# Allegro board W8782_baseboard.brd
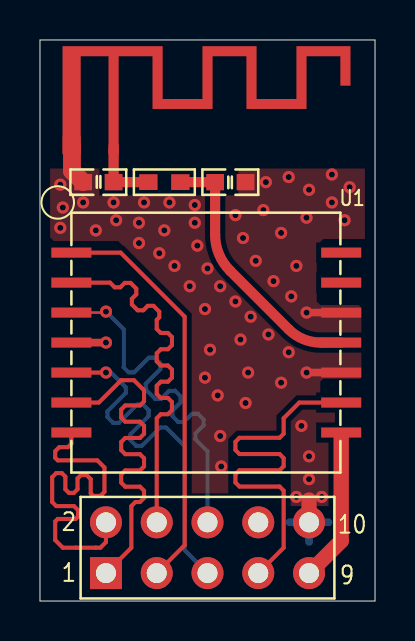
[diagram p0: board, top side]
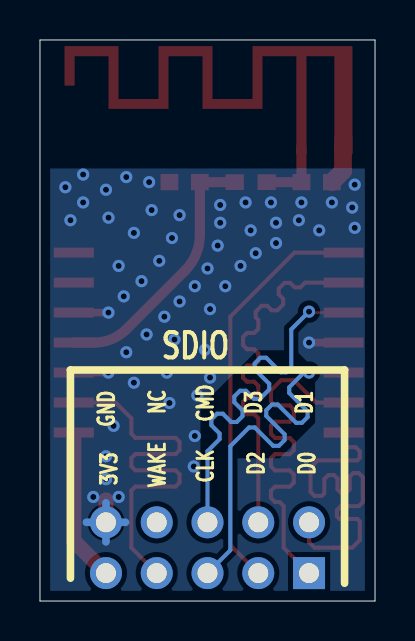
[diagram p1: board, bottom side, seen from below]

Outline 16.76 x 28.07 mm; copper layers: TOP, BOTTOM. Coordinates in mm from the lower left corner of the outline.
Outline path: 0,28.07 0,0 16.76,0 16.76,28.07 0,28.07

## Placement (name value [footprint] x y rotation side)
C1  NC  [C0603]  9.52 20.96 0 top
C2  NC  [C0603]  2.92 20.96 180 top
E1  ANTENNA  [W8782_ANT]  3.68 22.61 90 top
J1  HEADER 5X2  [HDR_2X5]  3.3 1.4 0 top
L1  10pF  [R0603]  6.22 20.96 180 top
NOREF  -  []  0 28.07 0 top
NOREF#2  -  []  16.76 0 90 top
U1  W8782  [W8782_MODULE]  8.38 12.95 90 top

## Library data of the parts
C1 C2 = CAP NP
E1 = ANTENNA
J1 = HEADER 5X2
L1 = INDUCTANCE
U1 = W8782

## Footprints (pads in the part's own frame, mm; a bottom-side part is the same pattern mirrored in y, then rotated)
C0603
  rect 0.889x0.813 smd: 1(-0.762,0) 2(0.762,0)
HDR_2X5
  rect 1.6x1.6 hole 1: 1(0,0)
  round 1.6 hole 1: 2(0,2.54) 3(2.54,0) 4(2.54,2.54) 5(5.08,0) 6(5.08,2.54) 7(7.62,0) 8(7.62,2.54) 9(10.16,0) 10(10.16,2.54)
R0603
  rect 0.914x0.787 smd: 1(-0.8,0) 2(0.8,0)
W8782_ANT
  rect 0.9x0.9 smd: (0.202,2.098)
  rect 0.5x0.5 smd: 1(0,0)
W8782_MODULE
  rect 0.5x2 smd: 1(4.475,6.811) 2(2.975,6.811) 3(1.475,6.811) 4(-0.025,6.811) 5(-1.525,6.811) 6(-3.025,6.811) 7(-4.525,6.811) 8(-4.525,-6.689) 9(-3.025,-6.689) 10(-1.525,-6.689) 11(-0.025,-6.689) 12(1.475,-6.689) 13(2.975,-6.689) 14(4.475,-6.689)

## Nets
GND: C1.2 C2.2 J1.10 U1.4(GND#4) U1.10(GND#10) U1.12(GND#12)
VCC_3V3: J1.9 U1.8(3V3)
SDIO_CLK: J1.5 U1.5(SD_CLK)
SDIO_CMD: J1.6 U1.3(SD_CMD)
SDIO_D0: J1.1 U1.6(SD_D0)
SDIO_D1: J1.2 U1.7(SD_D1)
SDIO_D2: J1.3 U1.1(SD_D2)
SDIO_D3: J1.4 U1.2(SD_D3)
WL_WAKE: J1.7 U1.9(PDN)
N00134: C1.1 L1.1 U1.11(ANT_RF)
N00570: C2.1 E1.1 L1.2

Pads without a net: J1 8; U1 13 14

## Via types
v1: diameter 0.61, hole 0.305, TOP to BOTTOM, 60 vias

## Routing (per net, layer and track width the routed paths; a pad name or vN(x,y) marks a point on that pad's centre or on a via; arc(x,y) is an arc through that point)
GND: length 12.3
  TOP w0.381: U1.12 v1(13.34,14.43) ; U1.4 v1(3.3,12.93) ; U1.10 v1(13.34,11.43)
  TOP w0.762: J1.10 13.46,5.05
  TOP w0.889: C2.2 1.6,21.51 1.6,22.81
  BOTTOM w0.381: J1.10 14.44,3.94 ; J1.10 12.48,3.94 ; J1.10 13.46,4.92 ; J1.10 13.46,2.96
  vias: v1(1.02,20.83) v1(1.02,18.67) v1(1.14,19.68) v1(2.16,19.94) v1(2.79,18.54) v1(3.68,19.94) v1(3.81,19.05) v1(4.95,18.92) v1(4.95,17.91) v1(5.21,19.94) v1(5.97,17.4) v1(6.22,18.54) v1(6.48,19.94) v1(6.73,16.76) v1(7.49,15.75) v1(7.75,19.81) v1(7.75,18.92) v1(7.87,17.78) v1(8.25,14.61) v1(8.25,11.18) v1(8.38,16.64) v1(8.51,12.57) v1(8.89,10.29) v1(9.02,15.75) v1(9.02,8.25) v1(9.07,6.73) v1(9.78,19.3) v1(9.78,14.99) v1(10.03,13.08) v1(10.16,18.16) v1(10.29,9.91) v1(10.41,11.43) v1(10.54,14.22) v1(10.8,17.02) v1(11.18,19.56) v1(11.3,20.96) v1(11.43,13.34) v1(11.68,16) v1(12.07,18.41) v1(12.07,10.92) v1(12.45,21.21) v1(12.45,12.45) v1(12.57,15.24) v1(12.83,16.76) v1(12.83,5.21) v1(13.08,8.76) v1(13.34,19.18) v1(13.46,20.57) v1(13.46,7.24) v1(13.46,6.1) v1(14.1,5.21) v1(14.61,21.34) v1(14.61,19.94) v1(15.24,19.05) v1(15.49,20.7)
VCC_3V3: length 7.7
  TOP w0.254: U1.8 15.07,8.15
  TOP w0.762: 15.07,8.15 15.07,3.01 J1.9
SDIO_CLK: length 19.9
  TOP w0.203: U1.5 v1(3.3,11.43)
  BOTTOM w0.203: J1.5 7.24,2.54 7.24,7.75 6.3,8.68 6.02,8.68 5.1,7.76 4.81,7.76 4.52,8.05 4.52,8.34 5.44,9.26 5.44,9.54 5.15,9.83 4.87,9.83 3.95,8.91 3.66,8.91 3.37,9.2 3.37,9.49 4.29,10.41 4.29,10.69 3.56,11.43 v1(3.3,11.43)
SDIO_CMD: length 19.8
  TOP w0.127: v1(3.3,14.48) 3.25,14.43 U1.3
  BOTTOM w0.203: v1(3.3,14.48) 4.19,13.59 4.19,11.68 4.43,11.44 4.72,11.44 5.45,12.17 5.74,12.17 6.02,11.88 6.02,11.6 5.29,10.87 5.29,10.58 5.77,10.11 6.05,10.11 6.47,10.52 6.75,10.52 7.04,10.23 7.04,9.94 6.63,9.53 6.63,9.25 6.92,8.96 7.2,8.96 7.61,9.37 7.9,9.37 8.19,9.08 8.19,8.8 7.78,8.38 7.78,8.1 8.38,7.49 J1.6
SDIO_D0: length 19.8
  TOP w0.203: J1.1 4.57,2.67 4.57,4.75 4.78,4.95 5,4.95 5.21,5.16 5.21,5.52 5,5.72 4.27,5.72 4.06,5.92 4.06,6.33 4.27,6.53 5,6.53 5.21,6.74 5.21,7.14 5,7.35 4.27,7.35 4.06,7.55 4.06,7.95 4.27,8.16 5,8.16 5.21,8.36 5.21,8.77 5,8.97 4.27,8.97 4.06,9.17 4.06,9.58 4.27,9.78 5,9.78 5.21,9.99 5.21,10.54 4.7,11.05 4.06,11.05 2.94,9.93 U1.6
SDIO_D1: length 19.8
  TOP w0.203: J1.2 3.3,2.95 3.02,2.67 2.79,2.67 2.06,2.67 2.06,2.67 1.8,2.67 1.14,2.67 0.76,3.05 0.76,3.98 0.89,4.1 1.78,4.1 1.9,4.23 1.9,4.55 1.7,4.75 0.81,4.75 0.61,4.95 0.61,6.2 0.81,6.4 1.09,6.4 1.27,6.22 1.27,5.59 1.45,5.41 1.7,5.41 1.88,5.59 1.88,6.13 2.05,6.3 2.34,6.3 2.54,6.1 2.54,5.38 2.67,5.26 3.02,5.26 3.23,5.46 3.23,6.68 2.87,7.04 0.89,7.04 0.76,7.16 0.76,7.49 0.97,7.7 1.4,7.7 1.57,7.87 U1.7
SDIO_D2: length 20.4
  TOP w0.203: J1.3 7.24,2.79 7.24,14.22 4.03,17.43 U1.1
SDIO_D3: length 19.9
  TOP w0.203: J1.4 5.84,9.14 6.05,9.34 6.4,9.34 6.6,9.55 6.6,9.95 6.4,10.16 6.05,10.16 5.84,10.36 5.84,10.77 6.05,10.97 6.4,10.97 6.6,11.17 6.6,11.58 6.4,11.78 6.05,11.78 5.84,11.99 5.84,12.39 6.05,12.6 6.4,12.6 6.6,12.8 6.6,13.21 6.4,13.41 6.05,13.41 5.84,13.61 5.84,14.06 5.97,14.19 5.97,14.48 5.68,14.77 5.39,14.77 5.17,14.55 4.89,14.55 4.6,14.83 4.6,15.12 4.82,15.34 4.82,15.63 4.53,15.92 4.24,15.92 4.02,15.69 3.74,15.69 3.5,15.93 U1.2
WL_WAKE: length 20.2
  TOP w0.203: J1.7 12.19,2.67 12.19,5.52 11.99,5.73 9.98,5.73 9.78,5.93 9.78,6.34 9.98,6.54 11.99,6.54 12.19,6.74 12.19,7.15 11.99,7.35 9.98,7.35 9.78,7.56 9.78,7.96 9.98,8.17 11.99,8.17 12.19,8.37 12.19,9.14 12.98,9.93 U1.9
N00134: length 13.3
  TOP w0.508: L1.1 C1.1 8.76,18.32 arc(8.96,17.35) 9.51,16.53 12.45,13.59 arc(13.18,13.1) 14.04,12.93 U1.11
N00570: length 3.4
  TOP w0.508: E1.1 C2.1 L1.2

## Copper pours and planes (outline as drawn; the poured copper is in the pictures)
GND on TOP: 11.86,4.75 11.86,5.38 7.59,5.38 7.59,14.33 3.91,18.01 0.69,18.01 0.51,18.19 0.51,21.64 2.97,21.64 2.97,20.29 9.93,20.29 9.93,21.64 16.26,21.64 16.26,18.11 14.17,18.11 13.84,17.78 13.84,14.99 14.02,14.81 15.95,14.81 16.08,14.68 16.08,11.18 16.03,11.13 14.17,11.13 14.02,10.97 14.02,10.19 14.76,9.45 14.76,4.95 14.55,4.75 ; 2 cut-outs
GND on BOTTOM: 0.51,0.51 0.51,21.64 16.26,21.64 16.26,0.51 ; 1 cut-out
N00570 on TOP (solid shape): 6.13,25.12 8.13,25.12 8.13,27.76 10.83,27.76 10.83,25.12 12.83,25.12 12.83,27.76 15.53,27.76 15.53,25.79 15.03,25.79 15.03,27.26 13.33,27.26 13.33,24.62 10.33,24.62 10.33,27.26 8.63,27.26 8.63,24.62 5.63,24.62 5.63,25.74 5.63,25.74 5.63,27.26 3.93,27.26 3.93,22.36 3.43,22.36 3.43,27.26 2.03,27.26 2.03,22.36 1.13,22.36 1.13,27.76 6.13,27.76

## Text on the board
Ref Des/Silkscreen Bottom: D0 | D1 | D2 | D3 | CMD | CLK | NC | WAKE | 3V3 | GND | SDIO
NCLEGEND-1-2: FIGURE | SIZE | 12.0 | 39.37 | DRILL CHART: TOP to BOTTOM | ALL UNITS ARE IN MILS | PLATED | QTY | 60 | 1 | 9
